# EAGLE board smps test (EAGLE 7.2.0)
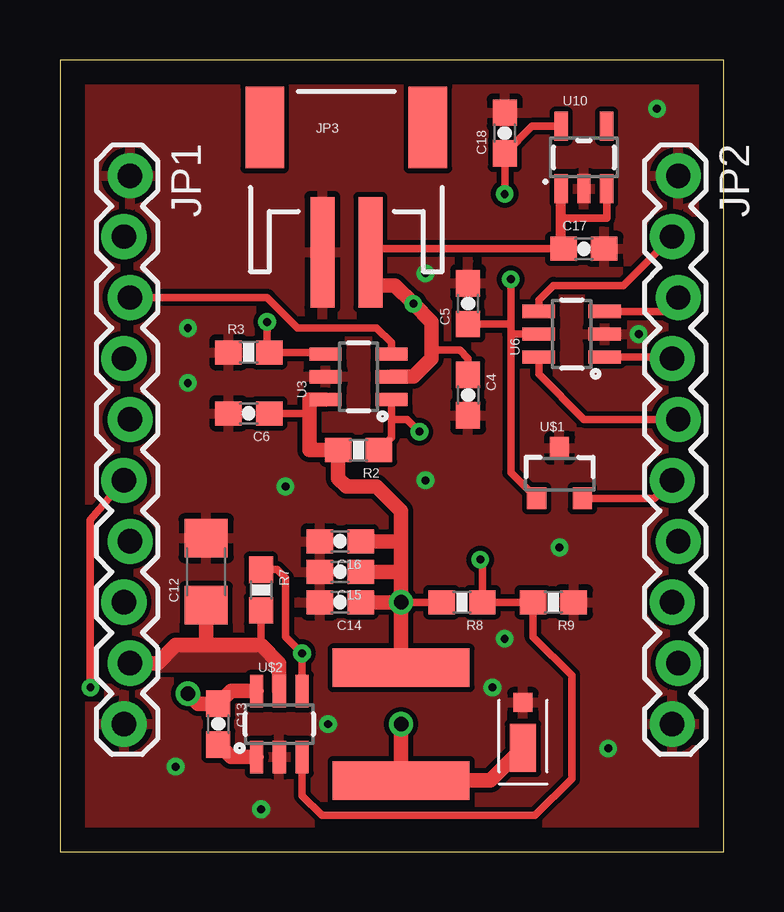
[diagram p0: board, top side]
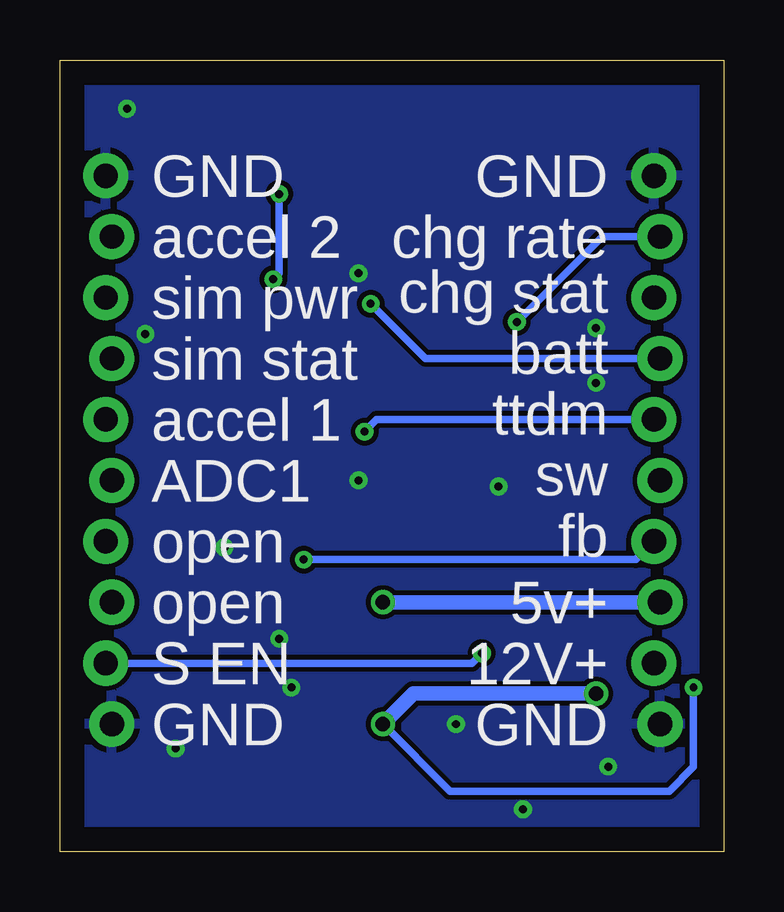
[diagram p1: board, bottom side, seen from below]

Size 27.69 x 33.02 mm. Coordinates in mm from the lower left corner, seen from the top.
Outline: 0,0 27.69,0 27.69,33.02 0,33.02 0,0
Copper layers (1*16): Top 0.035mm / dielectric 1.5mm / Bottom 0.035mm
Design rules "default": minimum track width 10mil, minimum drill 24mil, track to track 8mil, track to pad 8mil, pad to pad 8mil, via to via 8mil, smd to smd 8mil, copper to edge 40mil, drill to drill 8mil, minimum pad ring 10mil, minimum via ring 8mil, stop-mask expansion 4mil, vias tented up to drill 0mil, thermal gap 10mil

## Footprints (pad centres in the part's own frame; a part is rotated, then mirrored left to right if it is on the bottom)
0603-CAP = smd 1.1 x 1: 1 -0.85,0; 2 0.85,0
1206 = smd 1.6 x 1.8: 1 -1.4,0; 2 1.4,0
MICRO_SMP = smd 2 x 1.1: P$1 -1,0 | smd 0.8 x 0.8: P$2 0.9,0
1X10_LOCK = drill 1.016 pad 1.88: 1 0,0.127; 2 2.54,-0.127; 3 5.08,0.127; 4 7.62,-0.127; 5 10.16,0.127; 6 12.7,-0.127; 7 15.24,0.127; 8 17.78,-0.127; 9 20.32,0.127; 10 22.86,-0.127
JST-2-SMD = smd 1 x 4.6: 1 -1,-3.7; 2 1,-3.7 | smd 1.6 x 3.4: NC1 -3.4,1.5; NC2 3.4,1.5
0603-RES = smd 1.1 x 1: 1 -0.85,0; 2 0.85,0
SOT23-6 = smd 0.55 x 1.35: 1 -0.95,-1.375; 2 0,-1.375; 3 0.95,-1.375; 4 0.95,1.375; 5 0,1.375; 6 -0.95,1.375
SOT23-5 = smd 0.55 x 1.2: 1 -0.95,-1.3; 2 0,-1.3; 3 0.95,-1.3; 4 0.95,1.3; 5 -0.95,1.3
SOT23-3 = smd 0.8 x 0.9: 1 -0.95,-1; 2 0.95,-1; 3 0,1.1
INDUCTOR_FIXED = smd 1.6 x 5.7: P$1 -2.35,0; P$2 2.35,0

## Placement (x,y rotation side)
C4  1.0uF  [0603-CAP]  17.02,19.05 270 top
C5  1.0uF  [0603-CAP]  17.02,22.86 90 top
C6  1.0uF  [0603-CAP]  7.87,18.29 180 top
C12  10uF 10% X5R  [1206]  6.1,11.68 90 top
C13  X5R 10uF 25V  [0603-CAP]  6.6,5.33 270 top
C14  [0603-CAP]  11.68,10.41 180 top
C15  [0603-CAP]  11.68,11.68 180 top
C16  X5R 22uF 10v x3  [0603-CAP]  11.68,12.95 180 top
C17  1.0uF  [0603-CAP]  21.84,25.15 0 top
C18  2.2uF tant  [0603-CAP]  18.54,29.97 90 top
D1  DIODE-SCHOTTKY  [MICRO_SMP]  19.3,5.33 90 top
JP1  [1X10_LOCK]  2.79,28.19 270 top
JP2  [1X10_LOCK]  25.65,28.19 270 top
JP3  [JST-2-SMD]  11.94,28.7 0 top
R2  10k  [0603-RES]  12.45,16.76 180 top
R3  1.1k 1%  [0603-RES]  7.87,20.83 0 top
R7  47K  [0603-RES]  8.38,10.92 270 top
R8  120k  [0603-RES]  16.76,10.41 180 top
R9  23.2k  [0603-RES]  20.57,10.41 180 top
U3  BQ21040  [SOT23-6]  12.45,19.81 90 top
U6  PIC10F200  [SOT23-6]  21.34,21.59 90 top
U10  V_REG_LDOSMD  [SOT23-5]  21.84,28.96 0 top
U$1  MCP9700T-E  [SOT23-3]  20.83,15.75 0 top
U$2  AP3211  [SOT23-6]  9.14,5.33 0 top
U$4  INDUCTOR  [INDUCTOR_FIXED]  14.22,5.33 90 top

## Library data of the parts
C4-C6 = SparkFun-Capacitors; PROD_ID: CAP-00868
C12-C18 = SparkFun-Capacitors
D1 = SparkFun-DiscreteSemi
JP1 JP2 = SparkFun-Connectors
JP3 = SparkFun-Connectors; PROD_ID: CONN-11443
R2 R3 = SparkFun-Passives
R7 = SparkFun-Resistors; PROD_ID: RES-07871
R8 R9 = SparkFun-Resistors
U3 U6 U$2 = SparkFun-DigitalIC
U10 = SparkFun-PowerIC
U$1 = SparkFun-AnalogIC
U$4 = User-Submitted

## Nets
3.3V+: C5.1 C18.1 U6.5 U10.5 U$1.1
5V+: C6.1 C14.1 C15.1 C16.1 JP1.8 R2.2 R8.2 U3.6 U$4.P$2
12V+: C12.1 JP1.9 R7.2 U$2.5
ACCEL_1: JP2.5 U6.6
ACCEL_2: JP2.2 U6.4
ADC1: JP2.6 U$1.2
BATT: C4.1 C17.1 JP1.4 JP3.2 U3.2 U10.1 U10.3
CHG_RATE: JP1.2 R3.2 U3.4
CHG_STAT: JP1.3 U3.3
FB: JP1.7 R8.1 R9.2 U$2.3
GND: C4.2 C5.2 C6.2 C12.2 C14.2 C15.2 C16.2 C17.2 C18.2 D1.P$2 JP1.1 JP1.10 JP2.1 JP2.10 JP3.1 R3.1 R9.1 U3.5 U6.2 U10.2 U$1.3 U$2.2
N$1: JP2.8
N$2: JP2.7
N$6: C13.2 U$2.1
SET_TTDM: JP1.5 R2.1 U3.1
SIMCOM_PWR: JP2.3 U6.3
SIMCOM_STATUS: JP2.4 U6.1
SMPS_EN: JP2.9 R7.1 U$2.4
SW: C13.1 D1.P$1 JP1.6 U$2.6 U$4.P$1

## Tracks (layer width: path | path; a pad name or v marks a point on that pad's centre or on a via)
3.3V+  (via drill 0.33)
  Top 0.305: U10.5 19.68,30.26 C18.1 v18.54,27.43 | v18.8,23.88 18.8,22.01 | 18.8,22.01 18.8,21.59 | C5.1 18.8,22.01 | U6.5 18.8,21.59 | 18.8,21.59 18.8,15.83 U$1.1
  Bottom 0.305: v18.54,27.43 18.54,24.13 v18.8,23.88
5V+  (via drill 0.6)
  Top 0.305: v14.22,10.41 R8.2 | 10.41,18.29 C6.1
  Top 0.61: U$4.P$2 v14.22,10.41 | v14.22,10.41 14.22,11.68 | 14.22,11.68 14.22,12.95 | C16.1 14.22,12.95 | C15.1 14.22,11.68 | C14.1 v14.22,10.41 | U3.6 10.41,18.86 10.41,18.29 10.41,16.76 R2.2 11.6,15.58 11.94,15.24 13.21,15.24 14.22,14.22 14.22,12.95
  Bottom 0.61: JP1.8 v14.22,10.41
12V+
  Top 0.305: 6.52,8.64 6.1,8.64 | R7.2 8.38,8.64
  Top 0.61: JP1.9 4.06,7.87 4.83,8.64 6.1,8.64 | 6.1,8.64 7.87,8.64 8.38,8.64 9.14,7.87 U$2.5 | 6.1,8.64 C12.1
  pour Top: 4.32,7.62 8.89,7.62 8.89,7.87 8.13,8.64 4.83,8.64 3.81,7.62
ACCEL_1
  Top 0.305: U6.6 19.96,19.92 21.84,18.03 JP2.5
ACCEL_2
  Top 0.305: U6.4 19.96,23.01 20.57,23.62 23.5,23.62 JP2.2
ADC1
  Top 0.305: U$1.2 24.78,14.75 JP2.6
BATT  (via drill 0.33)
  Top 0.305: U10.3 22.79,26.42 20.89,26.42 | C4.1 17.02,20.57 16.68,20.92 15.66,20.92 15.49,21.08 | C17.1 13.08,25.15 JP3.2
  Top 0.406: C17.1 20.89,25.25 20.89,26.42 U10.1
  Top 0.61: U3.2 14.73,19.81 15.49,20.57 15.49,21.08 15.49,22.1 v14.73,22.86 13.97,23.62 12.95,23.62 12.95,24.99 JP3.2
  Bottom 0.305: JP1.4 12.45,20.57 v14.73,22.86
CHG_RATE  (via drill 0.33)
  Top 0.305: U3.4 11.01,20.83 R3.2 8.64,20.83 v8.64,22.1
  Bottom 0.305: JP1.2 5.08,25.65 v8.64,22.1
CHG_STAT
  Top 0.305: U3.3 13.82,21.23 13.21,21.84 9.91,21.84 8.64,23.11 JP1.3
FB  (via drill 0.33)
  Top 0.305: U$2.3 10.09,2.35 10.92,1.52 19.81,1.52 21.34,3.05 21.34,7.37 19.72,8.98 R9.2 R8.1 17.61,12.1 v17.53,12.19
  Bottom 0.305: JP1.7 3.68,12.19 v17.53,12.19
GND  (via drill 0.33)
  other vias: 18.03,6.86 18.54,8.89 11.18,5.33 4.83,3.56 8.38,1.78 15.24,24.13 9.4,15.24 15.24,15.49 5.33,19.56 5.33,21.84 24.89,30.99 24.13,21.59 22.86,4.32 20.83,12.7
  pour Top (rank 2): 0.25,32 27.18,32 27.18,1.02 0.25,1.02
  pour Bottom: 0.25,32 27.18,32 27.18,1.02 0.25,1.02
N$6
  Top 0.61: C13.2 7.13,3.96 U$2.1
SET_TTDM  (via drill 0.33)
  Top 0.305: U3.1 13.82,18.03 | 13.82,18.03 13.82,17.29 R2.1 | v14.99,17.53 14.48,18.03 13.82,18.03
  Bottom 0.305: JP1.5 14.48,18.03 v14.99,17.53
SIMCOM_PWR
  Top 0.305: U6.3 25.21,22.54 JP2.3
SIMCOM_STATUS
  Top 0.305: U6.1 25.46,20.64 JP2.4
SMPS_EN  (via drill 0.33)
  Top 0.305: U$2.4 v10.09,8.28 9.4,8.98 9.4,11.43 9.06,11.77 R7.1
  Bottom 0.305: v10.09,8.28 10.5,7.87 JP2.9
SW  (via drill 0.33, 0.6)
  Top 0.305: JP1.6 1.27,13.84 v1.27,6.86
  Top 0.61: U$2.6 7.13,6.71 C13.1 5.75,6.18 v5.33,6.6 | D1.P$1 17.95,2.98 U$4.P$1 v14.22,5.33
  Bottom 0.305: v1.27,6.86 1.27,3.56 2.29,2.54 11.43,2.54 v14.22,5.33
  Bottom 0.61: v14.22,5.33 12.95,6.6 v5.33,6.6

## Text on the board
bPlace: GND | GND | chg rate | accel 2 | chg stat | sim pwr | batt | sim stat | ttdm | accel 1 | sw | ADC1 | fb | open | 5v+ | open | 12V+ | S EN | GND | GND